# Altium PCB lm1875 amplifier.PcbDoc
Units mil, origin at the board's own origin, x right, y up, seen from the top; angles counter-clockwise.
Board outline 7050 x 2565 mil, 2 copper layers (Top Layer, Bottom Layer); 60 components, 32 nets, 144 pads, 8 vias.
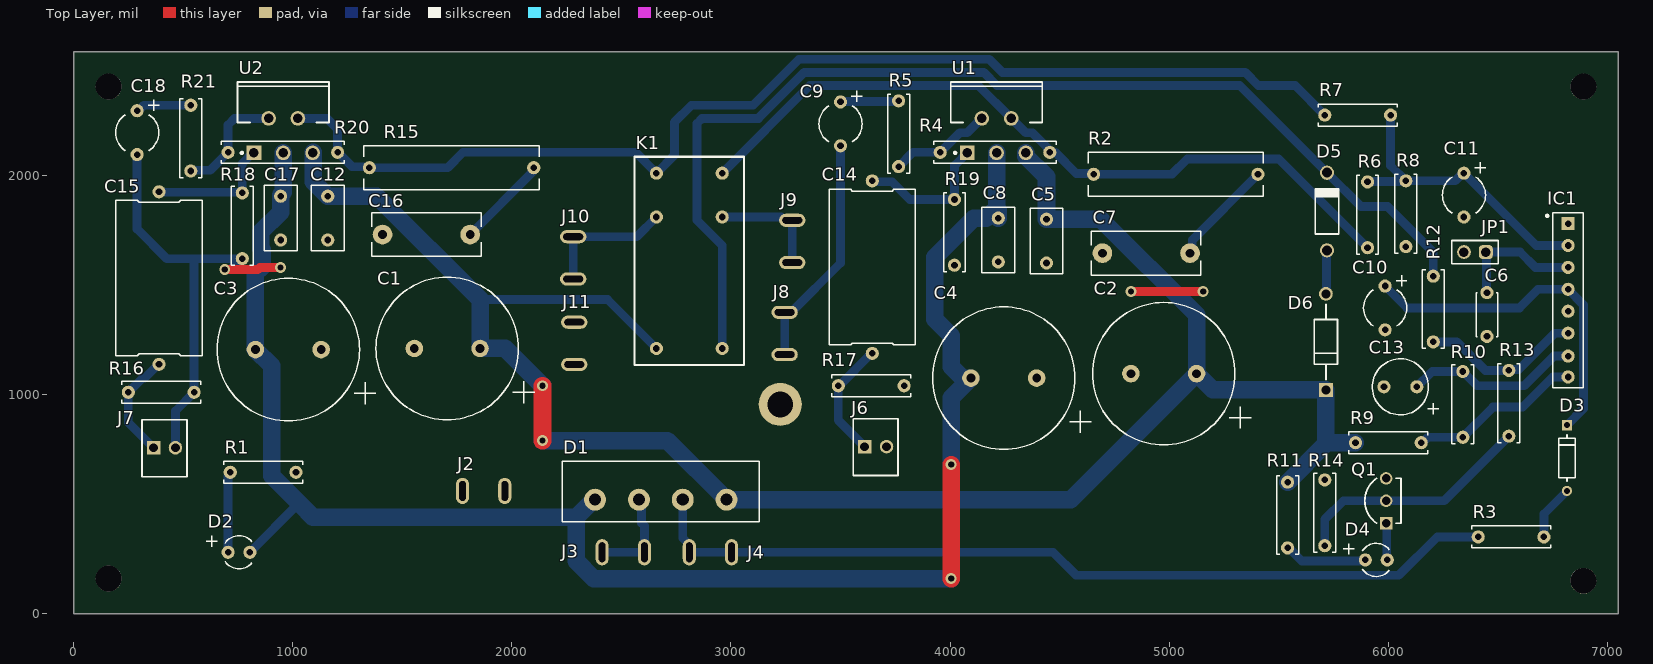
[diagram p0: Top Layer view]
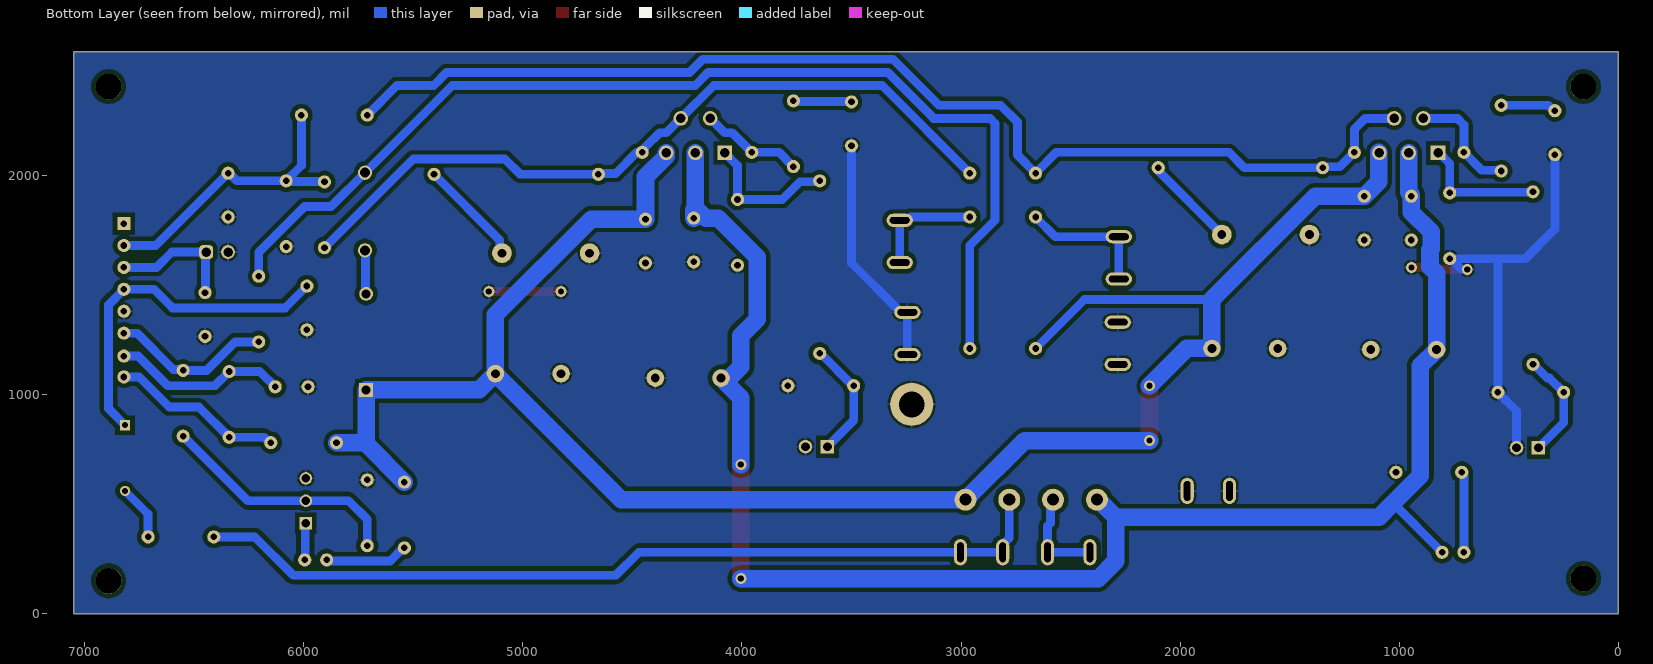
[diagram p1: Bottom Layer view, seen from below]

## Layer stack, top to bottom
Top Solder: solder mask 0.4, Solder Resist, Dk 3.5
Top Layer: signal copper 1.4
Dielectric 1: dielectric 12.6, FR-4, Dk 4.8
Bottom Layer: signal copper 1.4
Bottom Solder: solder mask 0.4, Solder Resist, Dk 3.5

## Board outline
0,0 7050,0 7050,2565 0,2565

## Design rules (kind name [scope] priority, off if disabled: settings)
Clearance [All] p1: gap=20 ignorepadtopadclearanceinfootprint=FALSE
HoleSize [All] p1: absolutevalues=TRUE maxlimit=196.85 minlimit=0.98 maxpercent=80.000 minpercent=20.000
PolygonConnect [All] p1: connectstyle=Relief reliefconductorwidth=10 reliefentries=4 polygonreliefangle="90 Angle" airgapwidth=10
RoomDefinition "lm1875 amplifier" [InComponentClass('lm1875 amplifier')] p1: confinementstyle=ConfineIn formatcopy=TRUE lockcomponents=FALSE outline 0,0 7050,0 7050,2565 0,2565
RoutingVias [All] p1: holewidth=28 width=50 viastyle="Through Hole" minholewidth=28 minwidth=50 maxholewidth=28 maxwidth=50
SolderMaskExpansion [All] p1: expansion=4 istentingtop=FALSE
Width [All] p1: maxlimit=80 minlimit=10 preferedwidth=10
29 further rules are at their usual default settings.

## Components (designator, comment, footprint, x,y, rotation, side; value= is the part's Value field where it differs from the comment)
C1 "3300uF" "CAPACITOR ELECTROLYTIC 16X21MM" 1855,1210 r180 top
C2 "3300uF" "CAPACITOR ELECTROLYTIC 16X21MM" 5125,1095 r180 top
C3 "3300uF" "CAPACITOR ELECTROLYTIC 16X21MM" 1130,1205 r180 top
C4 "3300uF" "CAPACITOR ELECTROLYTIC 16X21MM" 4395,1075 r180 top
C5 "100nF" "CAPACITOR 3X7MM" 4440,1800 r270 top
C6 "22nF" "CAPACITOR 2.5X5MM" 6450,1465 r270 top
C7 "220nF" "CAPACITOR MKT 5X13MM" 5095,1645 r180 top
C8 "100nF" "CAPACITOR 3X7MM" 4220,1805 r270 top
C9 "22uF" "CAPACITOR 5X11MM" 3500,2335 r270 top
C10 "4.7uF" "CAPACITOR 5X11MM" 5985,1495 r270 top
C11 "22uF" "CAPACITOR 5X11MM" 6345,2010 r270 top
C12 "100nF" "CAPACITOR 3X7MM" 1160,1905 r270 top
C13 "47uF" "CAPACITOR 6X11MM" 6130,1035 r180 top
C14 "2.2uF" "CAPACITOR BIPOLAR 10X16MM AXIAL" 3645,1187.6 r90 top
C15 "2.2uF" "CAPACITOR BIPOLAR 10X16MM AXIAL" 390,1137.6 r90 top
C16 "220nF" "CAPACITOR MKT 5X13MM" 1810,1730 r180 top
C17 "100nF" "CAPACITOR 3X7MM" 945,1905 r270 top
C18 "22uF" "CAPACITOR 5X11MM" 290,2295 r270 top
D1 "KBU1010" "KBU RECTIFIER" 2380,520 r0 top
D2 "Pwr Led" "LED 3MM" 705,280 r0 top
D3 "1N4148" FP-017AG-MFG 6815,710 r270 top
D4 "Prot Led" "LED 3MM" 5895,245 r0 top
D5 "1N4742A" FAIR-DO-41-2_V 5720,1835 r90 top
D6 "1N4004" FP-DO-41-MFG 5715,1240 r90 top
IC1 "UPC1237" "SIP 8 PIN" 6820,1780 r270 top
J2 "GND" "TERMINAL 6.3MM MALE" 1967.91,560 r180 top
J3 "17VAC" "TERMINAL 6.3MM MALE" 2605,280 r180 top
J4 "17VAC" "TERMINAL 6.3MM MALE" 3002.91,280 r180 top
J6 "22-23-5024" FP-22-23-5024-MFG 3660,760 r0 top
J7 "22-23-5024" FP-22-23-5024-MFG 415,755 r0 top
J8 "OUT L-" "TERMINAL 6.3MM MALE" 3245,1182.09 r90 top
J9 "OUT L+" "TERMINAL 6.3MM MALE" 3280,1602.09 r90 top
J10 "OUT R+" "TERMINAL 6.3MM MALE" 2280,1527.09 r90 top
J11 "OUT R-" "TERMINAL 6.3MM MALE" 2285,1137.09 r90 top
JP1 "" 61300211121 6395,1650 r180 top
K1 "hrm4-s-dc12v" "RELAY HRM4-S-DC12V" 2960,2010 r270 top
Q1 "BC546CTA" FP-135AR-MFG 5975.04,515 r180 top
R1 "2.2k" "RESISTOR 0207 1/4W" 715,645 r0 top
R2 "1R" "RESISTOR 1W" 5405,2005 r180 top
R3 "10k" "RESISTOR 0207 1/4W" 6410,350 r0 top
R4 "20k" "RESISTOR 0207 1/4W WIDE LEGS" 3955,2105 r0 top
R5 "1k" "RESISTOR 0207 1/4W" 3765,2040 r90 top
R6 "120k" "RESISTOR 0207 1/4W" 5905,1670 r90 top
R7 "120k" "RESISTOR 0207 1/4W" 6010,2275 r180 top
R8 "91k" "RESISTOR 0207 1/4W" 6080,1975 r270 top
R9 "9k1" "RESISTOR 0207 1/4W" 6150,780 r180 top
R10 "56k" "RESISTOR 0207 1/4W" 6340,1105 r270 top
R11 "2k2" "RESISTOR 0207 1/4W" 5540,300 r90 top
R12 "330R" "RESISTOR 0207 1/4W" 6205,1240 r90 top
R13 "68k" "RESISTOR 0207 1/4W" 6550,1110 r270 top
R14 "10k" "RESISTOR 0207 1/4W" 5710,310 r90 top
R15 "1R" "RESISTOR 1W" 2100,2035 r180 top
R16 "1M" "RESISTOR 0207 1/4W" 250,1010 r0 top
R17 "1M" "RESISTOR 0207 1/4W" 3490,1040 r0 top
R18 "22k" "RESISTOR 0207 1/4W" 770,1920 r270 top
R19 "22k" "RESISTOR 0207 1/4W" 4020,1890 r270 top
R20 "20k" "RESISTOR 0207 1/4W WIDE LEGS" 705,2105 r0 top
R21 "1k" "RESISTOR 0207 1/4W" 535,2020 r90 top
U1 "LM1875T" NDH0005A 4211.93,2181.26 r0 top
U2 "LM1875T" NDH0005A 956.93,2181.26 r0 top

## Footprints (in the part's own frame and the unit in brackets; to place one, negate y for a bottom-side part, rotate by r counter-clockwise, add the part's x,y. Pads: shape width x height; smd on the part's side, far side on the other; paste and mask are expansions set on the pad)
61300211121 [mm] "Pin Header, pitch 2.54 mm, THT, Vertical, single row, 2p"
  rrect50% 1.6x1.6 hole 1.1: 1(-1.27,0)
  round 1.6 hole 1.1: 2(1.27,0)
  silkscreen extent -2.69,-1.35 2.69,1.35, body extent -2.54,-1.27 2.54,1.27, height 8.57
"CAPACITOR 2.5X5MM" [mil]
  round 60 hole 30: 1(0,0) 2(200,0)
  silkscreen extent 0,-50 201,50, body extent -10,-50 210,50, height 200
"CAPACITOR 3X7MM" [mil]
  round 60 hole 30: 1(0,0) 2(200,0)
  silkscreen extent -50,-75 250,75, body extent -50,-75 250,75, height 200
"CAPACITOR 5X11MM" [mil]
  round 60 hole 30: 1(0,0) 2(200,0)
  silkscreen extent -50,-98 182,100, body extent -10,-98 210,98, height 533
"CAPACITOR 6X11MM" [mil]
  round 60 hole 30: 1(0,0) 2(150,0)
  silkscreen extent -100,-128 203,128, body extent -43,-118 193,118, height 531
"CAPACITOR BIPOLAR 10X16MM AXIAL" [mil]
  round 60 hole 30: 1(0,0) 2(787.4,0)
  silkscreen extent 39,-197 748,197, body extent -12,-197 799,197, height 394
"CAPACITOR ELECTROLYTIC 16X21MM" [mil]
  round 80 hole 40: 1(0,0) 2(300,0)
  silkscreen extent -250,-325 475,325, body extent -175,-325 475,325, height 850
"CAPACITOR MKT 5X13MM" [mil]
  round 90 hole 40: 1(0,0) 2(400,0)
  silkscreen extent -50,-100 450,100, body extent -50,-100 450,100, height 450
FAIR-DO-41-2_V [mm] "2-Leads, Axial leaded, Body 2.72x5.2mm, Pin Spacing 9mm"
  round 1.65 hole 1.15: 1(-4.5,0) 2(4.5,0)
  silkscreen extent -2.6,-1.36 2.6,1.36, body extent -4.93,-1.36 4.93,1.36, height 2.71
FP-017AG-MFG [mm]
  rect 1.2x1.2 hole 0.7 paste-2539.97 mask+0: 1(-3.813,0)
  round 1.2 hole 0.7 paste-2539.97 mask+0: 2(3.813,0)
  silkscreen extent -2.68,-0.95 2.68,0.95, body extent -4.51,-1.05 4.51,1.05, height 0.25
FP-22-23-5024-MFG [mil]
  rect 61.65x61.65 hole 40 paste-99999 mask+0: 1(-50,2)
  round 61.65 hole 40 paste-99999 mask+0: 2(50,2)
  silkscreen extent -102,-130 102,130, body extent -106,-134 106,134, height 10
FP-135AR-MFG [mm]
  rect 1.45x1.45 hole 0.95 paste-2539.97 mask+0: 1(-0.38,2.6)
  round 1.45 hole 0.95 paste-2539.97 mask+0: 2(-0.38,0) 3(-0.38,-2.6)
  silkscreen extent -2.09,-2.6 2.09,2.6, body extent -2.19,-3.42 2.19,3.42, height 0.25
FP-DO-41-MFG [mm]
  rect 1.6x1.6 hole 1.05 paste-2539.97 mask+0: 1(-5.57,0)
  round 1.6 hole 1.05 paste-2539.97 mask+0: 2(5.57,0)
  silkscreen extent -4.37,-1.35 4.37,1.35, body extent -6.47,-1.45 6.47,1.45, height 0.25
"KBU RECTIFIER" [mil]
  round 100 hole 55: 1(0,0) 2(200,0) 3(400,0) 4(600,0)
  silkscreen extent -150,-100 750,175, body extent -150,-100 750,175, height 775
"LED 3MM" [mil]
  round 60 hole 30: 1(0,0) 2(100,0)
  silkscreen extent -100,-76 109,76, body extent -26,-76 126,76, height 209
NDH0005A [mm] "FM, 5-Leads, Body 10.6x4.7mm, Pitch 1.7mm"
  rect 1.7x1.7 hole 1.1: 1(-3.4,-2)
  round 1.7 hole 1.1: 2(-1.7,2) 3(0,-2) 4(1.7,2) 5(3.4,-2)
  silkscreen extent -5.3,-2.12 5.3,6.23, body extent -5.35,-2.31 5.35,6.28, height 21.1
"RELAY HRM4-S-DC12V" [mil]
  round 60 hole 30: 1(0,0) 2(200,0) 3(0,-300) 4(200,-300) 5(800,0) 6(800,-300)
  silkscreen extent -75,-400 875,100, body extent -75,-400 875,100, height 975
"RESISTOR 1W" [mil]
  round 60 hole 30: 1(0,0) 2(750,0)
  silkscreen extent -25,-100 775,100, body extent -10,-100 760,100, height 200
"RESISTOR 0207 1/4W" [mil]
  round 60 hole 30: 1(0,0) 2(300,0)
  silkscreen extent -30,-50 330,50, body extent -10,-50 310,50, height 100
"RESISTOR 0207 1/4W WIDE LEGS" [mil]
  round 60 hole 30: 1(0,0) 2(500,0)
  silkscreen extent -30,-50 530,50, body extent -10,-50 510,50, height 200
"SIP 8 PIN" [mil]
  rect 60x60 hole 30: 1(0,0)
  round 60 hole 30: 2(100,0) 3(200,0) 4(300,0) 5(400,0) 6(500,0) 7(604.72,0) 8(700,0)
  silkscreen extent -50,-100 750,69, body extent -49,-70 751,70, height 220
"TERMINAL 6.3MM MALE" [mil]
  oval 60x120 hole 30 slot 90 at 90 deg: 1(0,0) 1(192.91,0)

## Part data
C1 C2 C3 C4: library part "Capacitor 16x21mm"
C5 C8 C12 C17: library part "Capacitor 3x7mm"
C6: library part "Capacitor 2.5x5mm"
C7 C16: library part "Capacitor MKT 5x13mm"
C9 C10 C11 C18: library part "Capacitor 5x11mm"
C13: library part "Capacitor 6x11mm"
C14 C15: library part "Capacitor Bipolar 10x16mm Axial"
D1: library part "Diode Rectifier KBU"
D2 D4: library part "Led 3mm"
D3: library part CMP-07163-000046-1, "DIODE GEN PURP 100V 200MA DO35", Average Rectified Current=200mA, Capacitance=4pF, Case/Package=DO-35, Current=4A, Forward Current=300mA, Forward Voltage=1V, Max Forward Surge Current (Ifsm)=1A, Max Operating Temperature=175°C, Max Power Dissipation=500mW, Max Repetitive Reverse Voltage (Vrrm)=100V, Max Reverse Current=5uA, Min Operating Temperature=-65°C, Package Quantity=2000, Contact Plating=Tin, Current Rating=200mA, Diameter=1.91mm, Element Configuration=Single, Height=4.56mm, Lead Free="Lead Free", Length=4.56mm, Max Reverse Voltage (DC)=100V, Max Surge Current=4A, Mount="Through Hole", Number of Pins=2, Output Current=200mA, Outside Diameter=1.85mm, Packaging=Bulk, Peak Non-Repetitive Surge Current=4A, Polarity=Standard, Power Dissipation=500mW, Radiation Hardening=No, REACH SVHC="No SVHC", Recovery Time=4ns, Reverse Recovery Time=4ns, Reverse Voltage=100V, Series=-, Voltage=100V, Voltage Rating (DC)=100V, Weight=0.01lb, Width=1.91mm
D5: library part CMP-0892-00001-1, "Zener Diode, 12V, 1W, 5%, -65 to 200 degC, 2-Pin DO-41, Body 2.72 x 5.2 mm, RoHS", Manufacturer="Fairchild Semiconductor", Operating and Storage Temperature Range="-65 to 200 degC", Test Current IZ (mA)=21, Tolerance=5%, ComponentLink1Description="Manufacturer URL", ComponentLink1URL=http://www.fairchildsemi.com/, ComponentLink2Description=Datasheet, ComponentLink2URL=http://www.fairchildsemi.com/ds/1N/1N4744A.pdf, ComponentLink3Description="Package Specification", ComponentLink3URL=http://www.fairchildsemi.com/dwg/DO/DO41A.pdf, DatasheetVersion="Rev. H3", IR (uA)=5, Mounting Technology="Through Hole", PackageDescription="2-Pin Axial leaded, Body 2.72 x 5.2 mm, Lead Spread 25.4 mm", PackageReference=DO-41-2, PackageVersion="Rev. 2", PartNumber=1N4742A, PD (W)=1, RoHS=TRUE, VZ (Max.) (V)=12.6, VZ (Min.) (V)=11.4, ZZ (Max) (ohm)=8
D6: library part CMP-56207-000012-1, "DIODE GEN PURP 400V 1A DO41", Average Rectified Current=1A, Capacitance=15pF, Case/Package=DO-41, Forward Voltage=1V, Max Forward Surge Current (Ifsm)=30A, Max Operating Temperature=150°C, Max Repetitive Reverse Voltage (Vrrm)=400V, Max Reverse Current=5uA, Min Operating Temperature=-55°C, Package Quantity=1, Current Rating=1A, Diameter=2.7mm, Element Configuration=Single, Forward Current=1A, Lead Free="Lead Free", Length=5.2mm, Max Reverse Voltage (DC)=400V, Max Surge Current=30A, Mount="Through Hole", Number of Pins=2, Output Current=1A, Packaging="Tape and Reel", Peak Non-Repetitive Surge Current=30A, Polarity=Standard, Radiation Hardening=No, Recovery Time=2000ns, Reverse Recovery Time=2us, Reverse Voltage=400V, RoHS Compliant=Yes, Voltage Rating (DC)=400V
J2 J3 J4 J8 J9 J10 J11: library part "6.3mm Male Terminal"
J6 J7: library part CMP-04776-000057-1, "CONN HEADER VERT 2POS 2.54MM", Current Rating=4A, Manufacturer=Molex, Voltage Rating=500V, Automotive=No, Category=Conn, ComponentLink2Description=Datasheet, ComponentLink2URL=https://www.molex.com/pdm_docs/sd/022235024_sd.pdf, Conn Gender=Male, Conn Orientation=Straight, Contact Material=Tin,Nickel, Device Class L1=Connectors, Device Class L2="Headers and Wire Housings", Device Class L3=unset, Digikey Description="CONN HEADER VERT 2POS 2.54MM", Height=8.43mm, Lead Free=Yes, Manufacturer Part Number=22-23-5024, Mouser Description="Headers & Wire Housings KK 100 Hdr Assy FLk Assy FLk 02 ckt Tin", Number of Contacts=2, Number of Rows=1, Octopart=https://octopart.com/22-23-5024-molex-6792956, Package=22-23-5024, Pitch=2.54mm, RoHS=TRUE
JP1: library part CMP-1712-00002-5, Color=Black, Contact Resistance=20mΩ, Current Rating=3A, Max Operating Temperature=125°C, Min Operating Temperature=-40°C, Operating Supply Voltage=250V, Connector Type="Male Pin", Contact Gender=Male, Contact Material=Copper, Contact Mating Length=5.9944mm, Contact Plating=Gold, Gender=Male, Height=8.94mm, Housing Material=PBT, Lead Free="Lead Free", Lead Pitch=2.54mm, Mount="Through Hole", NexarPartId=20081794, Number of Contacts=2, Number of Pins=2, Number of Positions=2, Number of Rows=1, Orientation=Vertical, Packaging=Bulk, Pitch=2.54mm, REACH SVHC="No SVHC", RoHS=Compliant, Termination="Through Hole", Voltage Rating=250V
K1: library part "Relay hrm4-s-dc12v"
Q1: library part CMP-00278-84408942-1, "BC546CTA Small Signal Bipolar Transistor, 0.1A I(C), 65V V(BR)CEO, 1-Element, NPN, Silicon, TO-92", Case/Package=TO-92-3, Collector Base Voltage (VCBO)=80V, Collector Emitter Breakdown Voltage=65V, Collector Emitter Saturation Voltage=250mV, Current Rating=100mA, Emitter Base Voltage (VEBO)=6V, Frequency=300MHz, Manufacturer Lifecycle Status=ACTIVE, Max Junction Temperature (Tj)=150°C, Max Power Dissipation=500mW, Min Operating Temperature=-65°C, Collector Emitter Voltage (VCEO)=65V, Contact Plating=Tin, Element Configuration=Single, Gain Bandwidth Product=300MHz, Height=4.58mm, hFE Min=110, Lead Free="Lead Free", Length=4.58mm, Lifecycle Status=Production, Max Breakdown Voltage=65V, Max Collector Current=100mA, Max Frequency=300MHz, Max Operating Temperature=150°C, Mount="Through Hole", NexarPartId=84408942, Number of Elements=1, Number of Pins=3, Polarity=NPN, Power Dissipation=500mW, Radiation Hardening=No, RoHS=Compliant, Schedule B="8541210080, 8541210080", Transition Frequency=300MHz, Voltage Rating (DC)=65V, Weight=240mg, Width=3.86mm
R1 R3 R4 R5 R6 R7 R8 R9 R10 R11 R12 R13 R14 R16 R17 R18 R19 R20 R21: library part Resistor
R2 R15: library part "Resistor 1W"
U1 U2: library part CMP-0057-00634-4, "20-W Audio Power Amplifier, 5-pin TO-220", Manufacturer="Texas Instruments", PackageTopMarking=NSUZXYTTE#*LM1875T, PowerWise=N, ComponentLink1Description="Datasheet URL", ComponentLink1URL=http://www.ti.com/general/docs/lit/getliterature.tsp?genericPartNumber=LM1875&fileType=pdf, CompType="Audio IC", PackageDescription="TO-220, Molded, Stagger Bend, 5 Lead", PackageReference=NDH0005A, PinCount=5, RoHS=N

## Free pads (board coordinates)
  round 118.11 hole 118.11 unplated: 9(160,160) 9(160,2405) 9(6890,150) 9(6890,2405)
  round 196.85 hole 118.11: 10(3225,955)

## Via types
v1: diameter 50, hole 28, Top Layer to Bottom Layer, 8 vias

## Nets (pads, with @x,y where several pads share a name; then routed paths per layer and width w, separated by ;. In a path a pad name is that pad's centre, name@x,y a point inside that pad or via, vN(x,y) a via of type N, cw(c..) or ccw(c..) an arc to the next point about the centre after c; other vN are vias at no path point)
GND: C1.2 C2.2 C3.1 C4.1 C5.2 C6.2 C7.2 C8.2 C9.2 C10.2 C11.2 C12.2 C13.2 C16.2 C17.2 C18.2 IC1.5 J2.1 J6.2 J7.2 J8.1 J11.1 JP1.2 pad.10 Q1.3 R1.2 R8.2 R14.2 R16.2 R17.2 R18.2 R19.2 | length 3550.5
  Top Layer w40: v1(690,1570) 839.95,1570 849.78,1579.83 v1(944.95,1579.83) ; v1(4825,1470) v1(5155,1470)
  Bottom Layer w40: C18.2 290,1755 425,1620 545,1620 ; J7.2 465,925 R16.2 550,1615 545,1620 ; v1(690,1570) 691.91,1571.91 716.5,1571.91 R18.2@764.59,1620 ; R18.2 R18.2@764.59,1620 ; J8.1@3235,1172.85 3244.24,1182.09 3245,1182.09 3245,1375 3275,1375 3500,1600 C9.2 ; 545,1620 R18.2@764.59,1620
NetC6_1: C6.1 IC1.3 JP1.1 | length 591.1
  Bottom Layer w40: C6.1 6447.5,1467.5 6447.5,1647.5 JP1.1 6600.54,1650 6670.54,1580 IC1.3
NetC7_1: C7.1 R2.1 | length 488.4
  Bottom Layer w40: C7.1 5104.57,1654.57 5104.57,1704.57 R2.1
NetC9_1: C9.1 R5.2 | length 267.1
  Bottom Layer w40: C9.1 3502.5,2337.5 3762.5,2337.5 R5.2
NetC10_1: C10.1 D3.1 IC1.4 | length 1591.6
  Bottom Layer w40: C10.1 6085,1395 6598.06,1395 6683.06,1480 IC1.4 6890,1410 6890,935.12 D3.1
NetC11_1: C11.1 IC1.2 R6.2 R7.1 R8.1 | length 1397.3
  Bottom Layer w40: R6.2 5907.5,1972.5 6077.5,1972.5 R8.1 ; R7.1 6010,2045 R8.1 ; IC1.2 6675,1680 C11.1 6339.59,2010 6304.59,1975 R8.1
NetC13_1: C13.1 IC1.7 R10.1 | length 798.2
  Bottom Layer w40: C13.1 6200,1105 R10.1 6405,1040 6620,1040 6755.28,1175.28 IC1.7@6816.28,1175.28
NetC14_1: C14.1 J6.1 R17.1 | length 543.8
  Bottom Layer w40: J6.1 3490,882 R17.1 3493.7,1040 3641.3,1187.6 C14.1
NetC14_2: C14.2 R19.1 U1.1 | length 646.8
  Bottom Layer w40: C14.2 3648.83,1971.17 3734.83,1971.17 3816.01,1890 R19.1 4020,2044.45 U1.1
NetC15_1: C15.1 J7.1 R16.1 | length 493.5
  Bottom Layer w40: J7.1 250,872 R16.1 315.15,1075.15 325.17,1075.15 387.61,1137.6 C15.1
NetC15_2: C15.2 R18.1 U2.1 | length 588
  Bottom Layer w40: C15.2 392.5,1922.5 767.5,1922.5 R18.1 770,2054.45 U2.1@820.57,2105.02
NetC16_1: C16.1 R15.1 | length 425.1
  Bottom Layer w40: C16.1 2096.17,2016.17 2096.17,2031.17 R15.1
NetC18_1: C18.1 R21.2 | length 255.4
  Bottom Layer w40: C18.1 295.41,2295 320.41,2320 R21.2
NetD1_2: D1.2 J3.1 | length 443.3
  Bottom Layer w40: J3.1@2412.09,280 2605,280 2605,400 2591.48,413.52 2591.48,508.52 D1.2
NetD1_3: D1.3 J4.1 R3.1 | length 3968.4
  Bottom Layer w40: D1.3 2780,345.41 2810,315.41 2810,280 3002.91,280 4469.97,280 4574.97,175 6047.8,175 6222.8,350 R3.1
NetD2_1: D2.1 R1.1 | length 369.1
  Bottom Layer w40: D2.1 705,629.59 715,639.59 R1.1
NetD3_2: D3.2 R3.2 | length 253.4
  Bottom Layer w40: R3.2 6710,454.88 D3.2
NetD4_1: D4.1 R11.1 | length 381.9
  Bottom Layer w40: R11.1 5545.41,300 5605.41,240 5884.59,240 5889.59,245 D4.1
NetD4_2: D4.2 Q1.1 | length 169.7
  Bottom Layer w40: Q1.1 5992.5,410.14 5992.5,247.5 D4.2
NetD5_1: D5.1 D6.2 | length 200.6
  Bottom Layer w40: D6.2 5717.5,1461.79 5717.5,1655.33 D5.1
NetD5_2: D5.2 K1.5 R12.2 | length 4980
  Bottom Layer w40: K1.5 2960,1680.21 2845,1795.21 2845,2236.57 2868.43,2260 3125.15,2260 3335.15,2470 4153.71,2470 4213.71,2410 5322.17,2410 D5.2 5873.72,1858.44 5995.55,1858.44 6205,1648.99 R12.2
NetIC1_6: IC1.6 R12.1 R13.1 | length 739.3
  Bottom Layer w40: R12.1 6312.5,1240 6442.5,1110 R13.1 6553.64,1113.64 6593.64,1113.64 6760,1280 IC1.6
NetIC1_8: IC1.8 R9.1 R10.2 | length 794.3
  Bottom Layer w40: R9.1 6155.41,780 6180.41,805 R10.2 6477.5,942.5 6612.5,942.5 6750,1080 IC1.8
NetJ9_1: J9.1 K1.2 | length 519.1
  Bottom Layer w40: K1.2 3229.59,1810 3244.59,1795 3280,1795 J9.1@3280,1602.09
NetJ10_1: J10.1 K1.4 | length 610.2
  Bottom Layer w40: J10.1@2280,1527.09 2280,1720 2570,1720 K1.4
NetK1_1: K1.1 R2.2 R4.2 R6.1 U1.4 | length 3475.6
  Bottom Layer w40: K1.1 3360,2410 4128.86,2410 U1.4 4279.71,2260 4345.37,2194.34 4375.66,2194.34 4445,2125 4445,2120.41 R4.2@4455,2110.41 ; R4.2 4480,2105 4576.17,2008.83 4651.17,2008.83 R2.2 5012.2,2005 5082.2,2075 5500,2075 R6.1
NetK1_3: K1.3 R7.2 R15.2 R20.2 U2.4 | length 5318
  Bottom Layer w40: U2.4 1155,2260 1205,2210 R20.2 1271.17,2038.83 1346.17,2038.83 R15.2 1707.2,2035 1777.2,2105 2565,2105 K1.3 2741.99,2091.99 2741.99,2241.84 2820.15,2320 3100.29,2320 3310.29,2530 4178.56,2530 4238.56,2470 5347.02,2470 5407.02,2410 5575,2410 R7.2
NetQ1_2: Q1.2 R13.2 R14.1 | length 1117.4
  Bottom Layer w40: R14.1 5710,430 5795,515 Q1.2 6255,515 R13.2
NetR4_1: R4.1 R5.1 U1.2 | length 471.1
  Bottom Layer w40: R5.1 3830,2105 R4.1 4044.34,2194.34 4078.48,2194.34 4144.15,2260 U1.2
NetR20_1: R20.1 R21.1 U2.2 | length 527.6
  Bottom Layer w40: R21.1 538.83,2023.83 623.83,2023.83 R20.1 705,2230 735,2260 U2.2
V+: C1.1 C2.1 C5.1 C12.1 D1.4 D6.1 K1.6 R9.2 R11.2 U1.5 U2.5 | length 8906.3
  Top Layer w80: v1(2140,790) v1(2140,1040)
  Bottom Layer w40: 1855,1433.49 2436.51,1433.49 K1.6
  Bottom Layer w80: U2.5@1093.29,2105.02 1093.29,1971.71 C12.1 1383.49,1905 1855,1433.49 C1.1 1970,1210 v1(2140,1040) ; v1(2140,790) 2710,790 D1.4 4550,520 C2.1 ; U1.5 4345.79,2086.93 4440,1992.72 C5.1 4688.49,1800 5125,1363.49 C2.1 ; R11.2 5715,775 ; R9.2 5720,780 5715,775 ; C2.1 5199.29,1020.71 D6.1 5715,775
V-: C3.2 C4.2 C8.1 C17.1 D1.1 D2.2 U1.3 U2.3 | length 7655.1
  Top Layer w80: v1(4005,160) v1(4005,680)
  Bottom Layer w40: D2.2 1023.86,498.86 1033.86,498.86
  Bottom Layer w80: U2.3 956.93,1922.34 945,1910.41 C17.1 945,1832.28 855,1742.28 855,1665 860,1660 860,1582.72 830,1552.72 C3.2 903.86,1131.14 903.86,628.86 1033.86,498.86 1092.72,440 2294.59,440 ; D1.1 2374.59,520 2294.59,440 ; v1(4005,160) 2374.81,160 2294.59,240.22 2294.59,440 ; v1(4005,680) 4005,985 C4.2 4056.82,1075 4005,1126.82 4005,1268.64 3930,1343.64 3930,1627.28 4107.72,1805 4165.07,1805 4192.53,1832.47 ; U1.3 4211.93,1851.86 4220,1843.79 C8.1
pads on no net: IC1.1

## Polygon pours and split planes (outlines as drawn)
GND on Bottom Layer "GND_L02_P000" (solid, pour order 0): 0,2565 7050,2565 7050,0 0,0

## Silkscreen, mask and mechanical layers (free items; w line width, h text height)
Board:
  the board outline again, w5.91